# Altium PCB ist_pit.PcbDoc
Units mm, origin at the board's own origin, x right, y up, seen from the top; angles counter-clockwise.
Board outline 69.99 x 63.3 mm, 2 copper layers (Top Layer, Bottom Layer); 7 components, 5 nets, 28 pads, 0 vias.
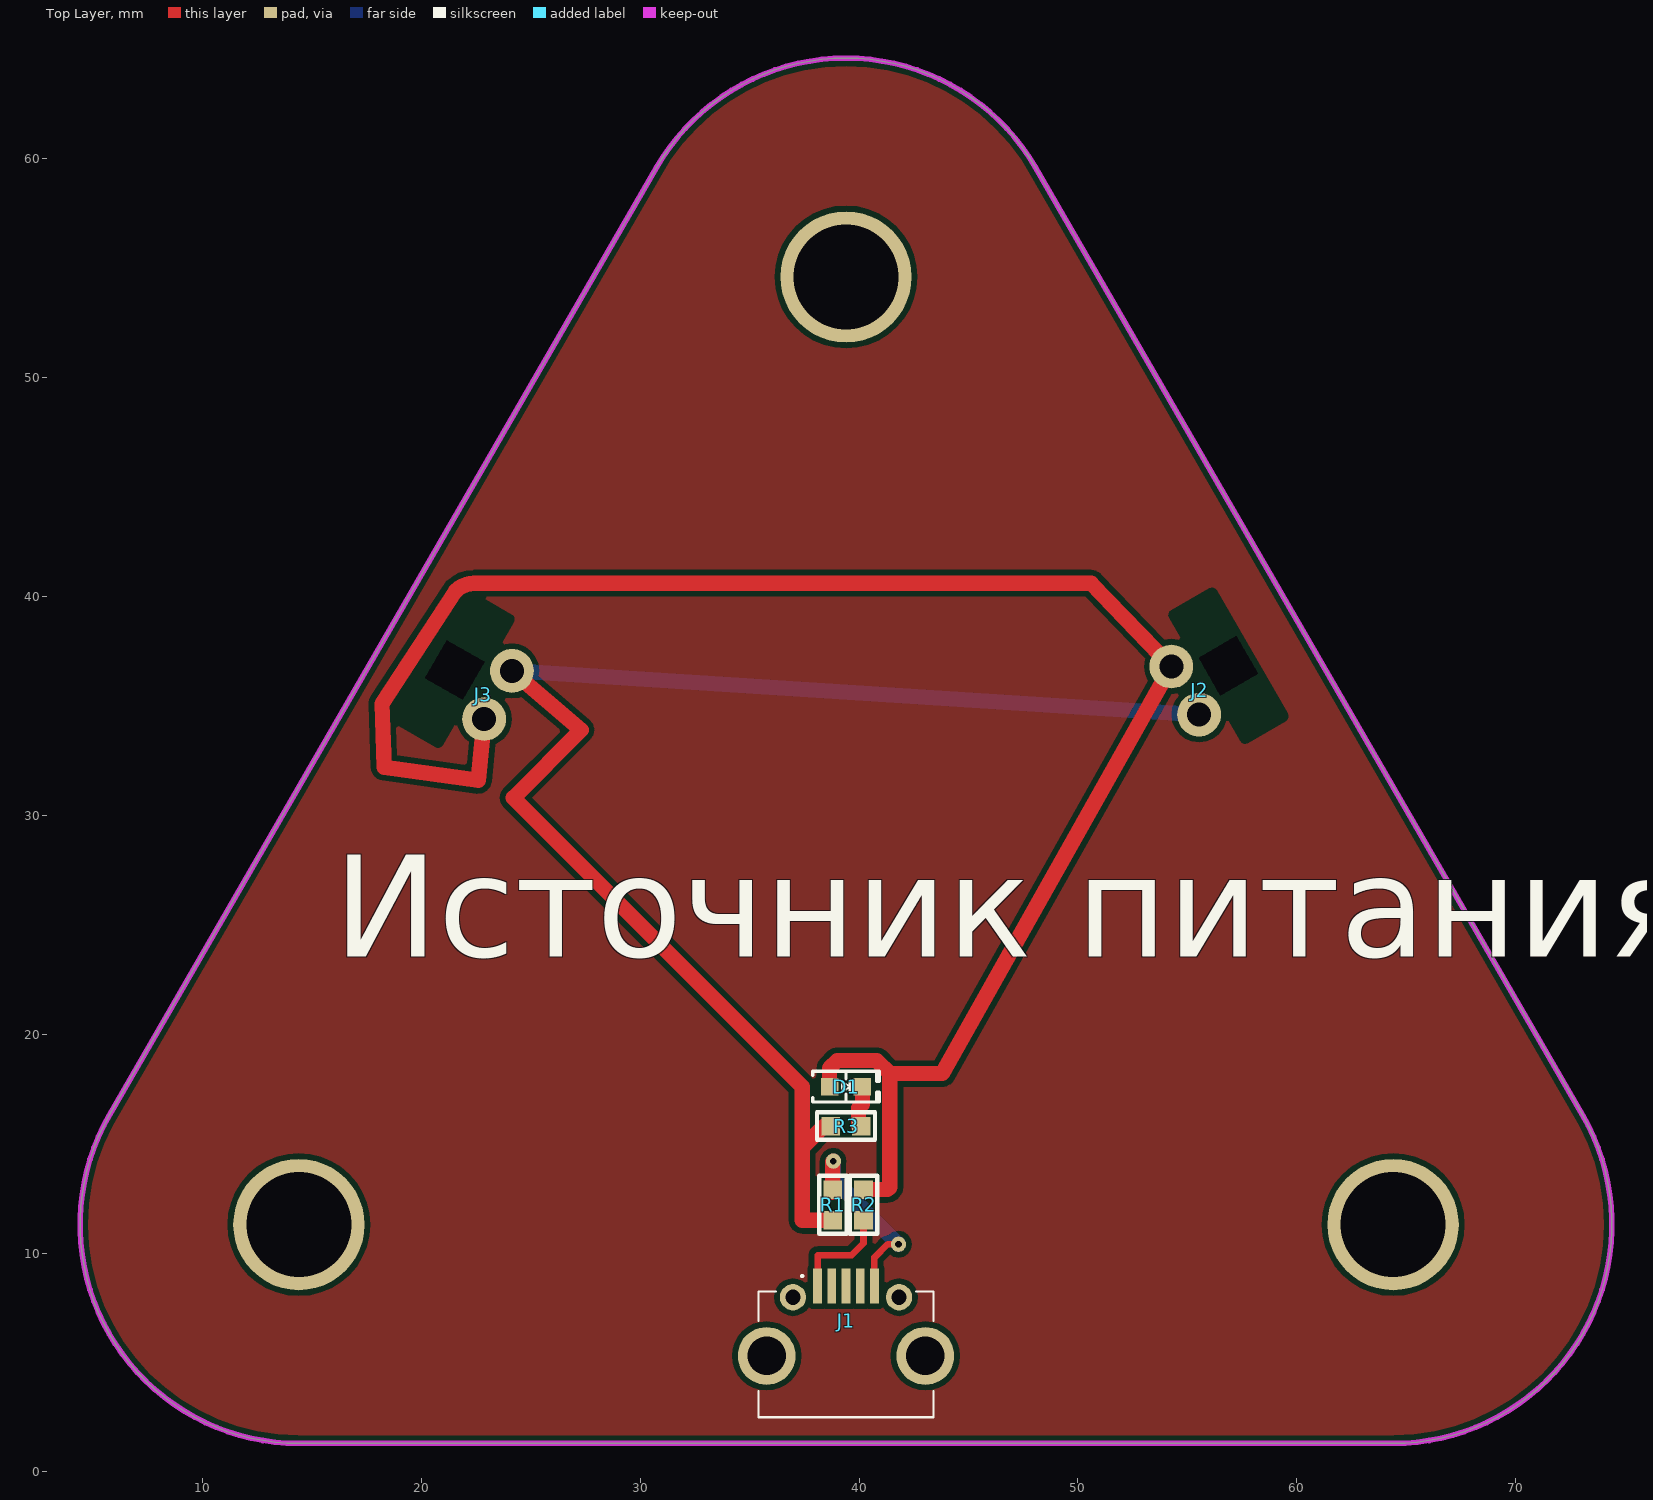
[diagram p0: Top Layer view]
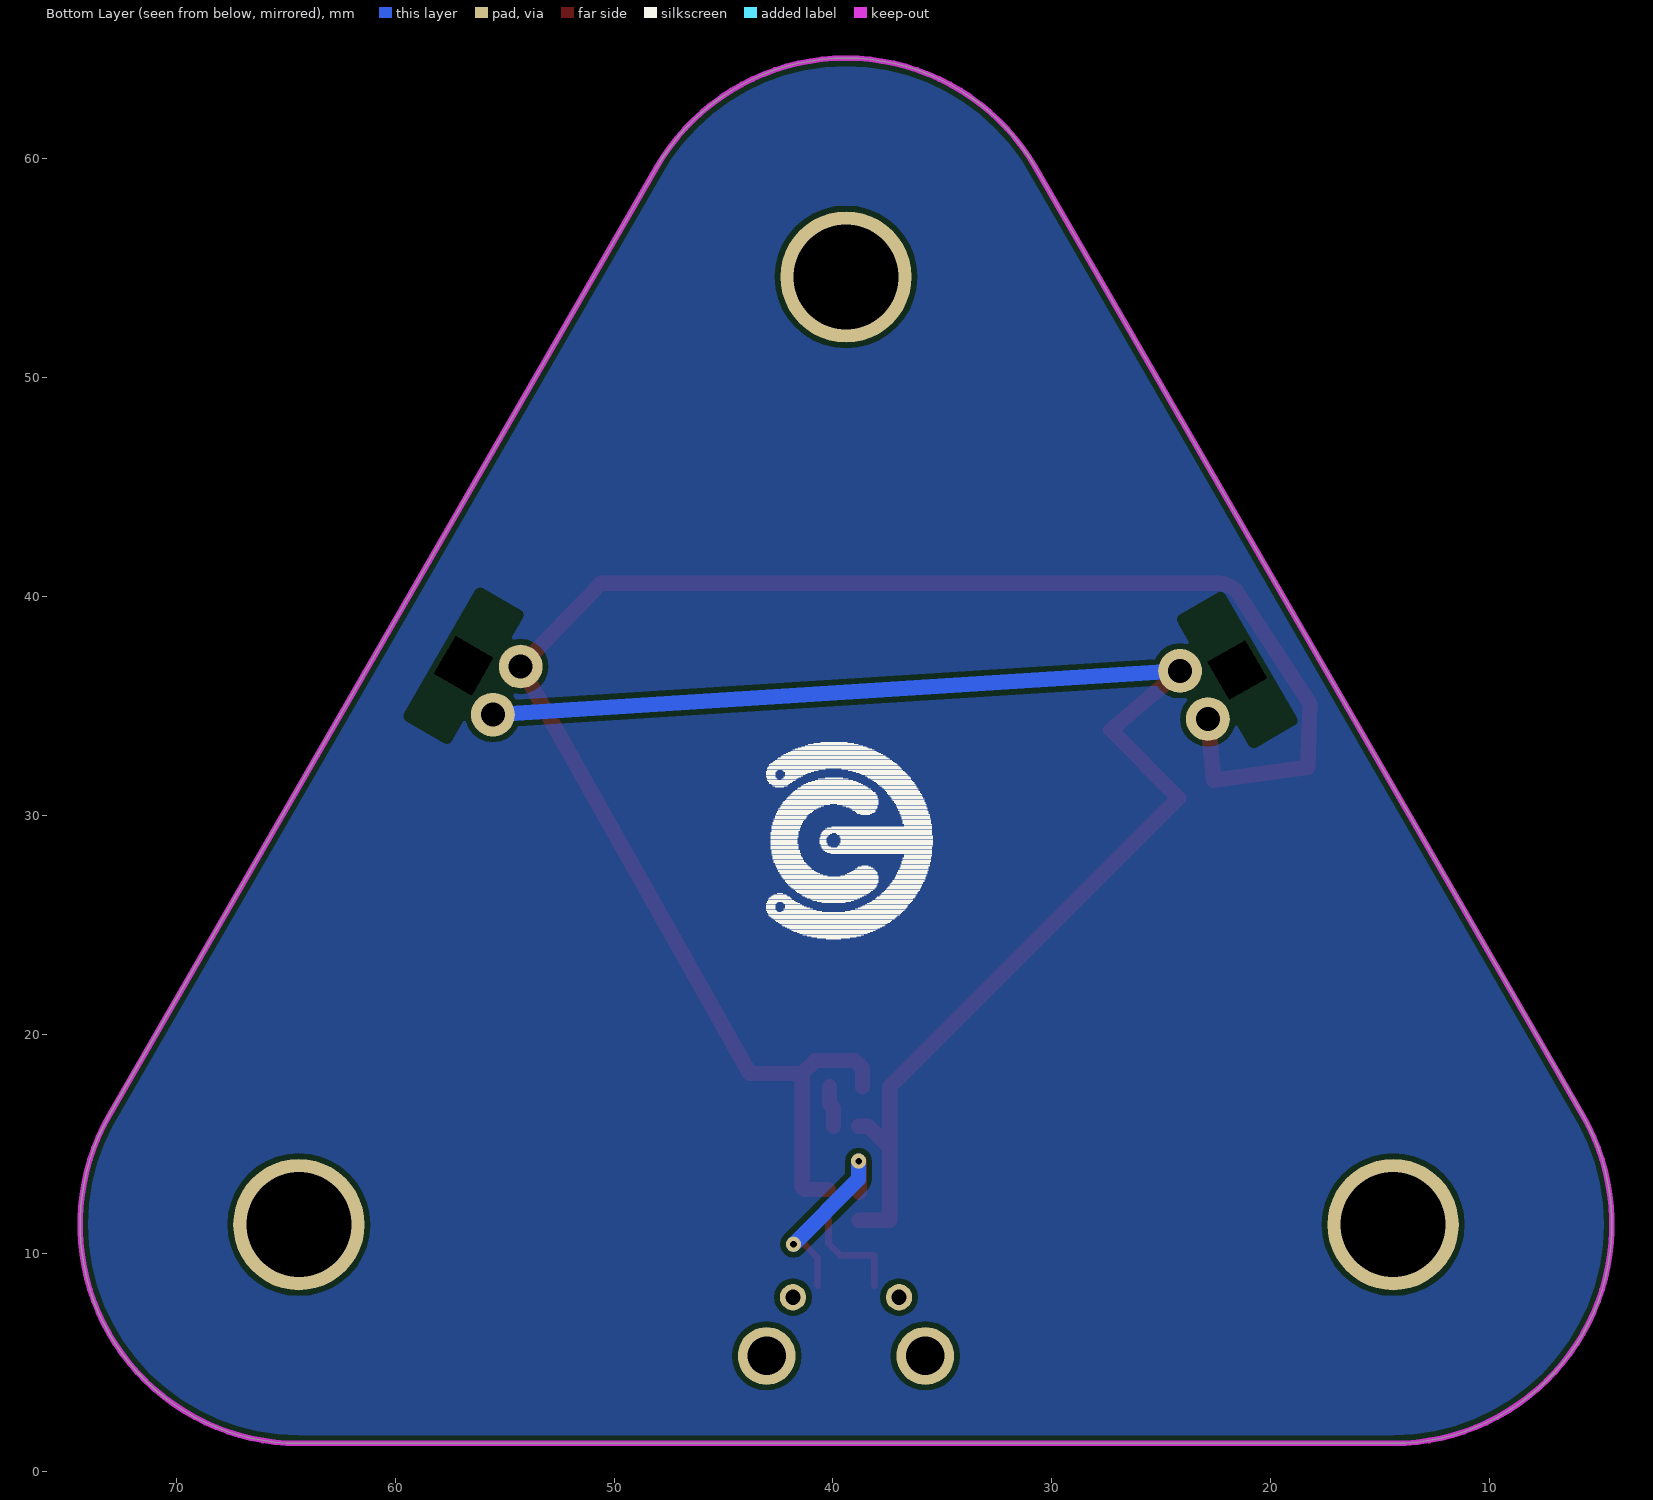
[diagram p1: Bottom Layer view, seen from below]
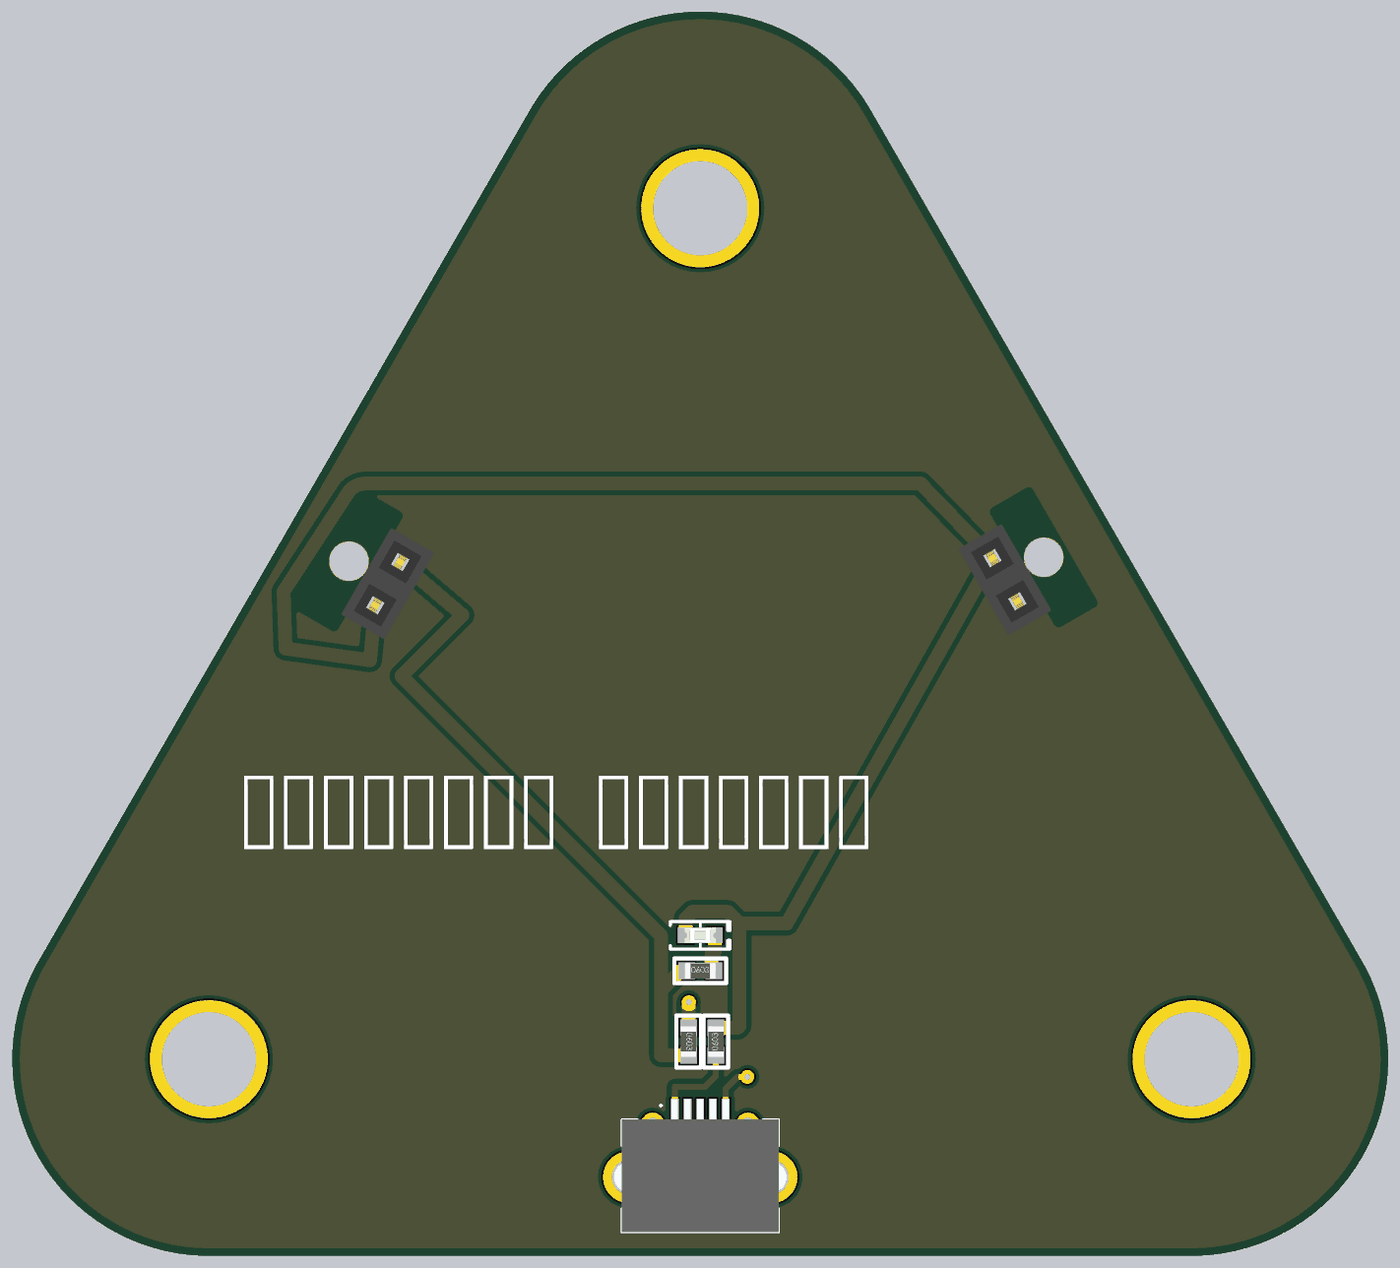
[diagram p2: 3D render of the assembled board from above, using the file's embedded part models]

## Layer stack, top to bottom
Top Solder: solder mask 0.0102, Solder Resist, Dk 3.5
Top Layer: signal copper 0.0356
Dielectric 1: dielectric 0.32, FR-4, Dk 4.8
Bottom Layer: signal copper 0.0356
Bottom Solder: solder mask 0.0102, Solder Resist, Dk 3.5

## Board outline
14.4,1.299 cw(c14.4,11.299) 5.74,16.299 30.74,59.6 cw(c39.4,54.6) 48.06,59.6 73.06,16.299 cw(c64.4,11.299) 64.4,1.299

## Design rules (kind name [scope] priority, off if disabled: settings)
Clearance [All] p1: gap=0.25 ignorepadtopadclearanceinfootprint=FALSE
PolygonConnect [All] p1: connectstyle=Relief reliefconductorwidth=0.254 reliefentries=4 polygonreliefangle="90 Angle" airgapwidth=0.254
RoutingVias [All] p1: holewidth=0.711 width=1.27 viastyle="Through Hole" minholewidth=0.711 minwidth=1.27 maxholewidth=0.711 maxwidth=1.27
SolderMaskExpansion [All] p1: expansion=0.102
Width [All] p1: maxlimit=2 minlimit=0.254 preferedwidth=0.7
30 further rules are at their usual default settings.

## Components (designator, comment, footprint, x,y, rotation, side; value= is the part's Value field where it differs from the comment)
D1 "Green" "LED 0603_1608 GREEN" 39.4,17.6 r0 top locked
J1 "C10418" C10418 39.4,5.5 r180 top locked
J2 "\"Разъем\"" "CON: PBS-2" 54.9,35.7 r120 top
J3 "\"Разъем\"" "CON: PBS-2" 23.5,35.5 r240 top
R1 "Resistor film, 100R, ±5%, 0603, 0.1W, -55...+125°C" "RES: 0603" 38.8,12.2 r270 top locked value=100R
R2 "Resistor film, 100R, ±5%, 0603, 0.1W, -55...+125°C" "RES: 0603" 40.2,12.2 r90 top locked value=100R
R3 "Resistor film, 100R, ±5%, 0603, 0.1W, -55...+125°C" "RES: 0603" 39.4,15.8 r0 top locked value=100R

## Footprints (in the part's own frame and the unit in brackets; to place one, negate y for a bottom-side part, rotate by r counter-clockwise, add the part's x,y. Pads: shape width x height; smd on the part's side, far side on the other; paste and mask are expansions set on the pad)
C10418 [mm]
  rect 0.4x1.6 smd: 1(1.3,-3) 2(0.65,-3) 3(0,-3) 4(-0.65,-3) 5(-1.3,-3)
  round 2.64 hole 1.76: 6(-3.625,0.2) 7(3.625,0.2)
  round 1.2 hole 0.7: 8(-2.425,-2.48) 9(2.425,-2.48)
  silkscreen extent -4,-3.5 4,3, body extent -4.4,-3.76 4.41,3, height 3.1
"CON: PBS-2" [mm]
  round 2 hole 1.1: 1(-1.27,0) 2(1.27,0)
  rrect50% 0x0 hole 2 square: ""(0,-2.28)
  body extent -2.54,-1.27 2.54,1.27, height 8.4
"LED 0603_1608 GREEN" [mm] "Chip Diode, 2-Leads, Body 1.60x0.80mm, IPC Medium Density"
  rect 0.8x0.8 smd: 1(-0.75,0) 2(0.75,0)
  silkscreen extent -1.52,-0.7 1.52,0.7, body extent -0.8,-0.4 0.8,0.4, height 0.53
"RES: 0603" [mm] "Chip Resistor, 2-Leads, Body 1.0x0.5mm, IPC Medium Density"
  rect 0.85x0.85 smd: 1(-0.7,0) 2(0.7,0)
  silkscreen extent -1.33,-0.63 1.33,0.63, body extent -0.8,-0.4 0.8,0.4, height 0.44

## Part data
D1: library part LSM0603453V, "LED SM 0603 3V -/1000/-MCD GREEN", Current - Test=20mA, Device Package="0603 (1608 Metric)", Lens Color=Colorless, Manufacturer="Visual Communications Company - VCC", Millicandela Rating=63mcd, Supplier Device Package="Chip LED", Supplier Part Number 1=LSM0603453VCT-ND, Voltage - Forward (Vf) (Typ)=2V, Color=Green, ComponentLink1Description=Datasheet, ComponentLink1URL=https://vcclite.com/wp-content/uploads/wpallimport/files/files/LSM0603453V.pdf, ComponentLink2Description="DigiKey Link", ComponentLink2URL=http://digikey.com/product-detail/en/visual-communications-company-vcc/LSM0603453V/LSM0603453VCT-ND/9486729, Configuration=Standard, Height (Max)=0.65mm, LastUpdated="21.01.2020 3:12:15", Lens Size="1.20mm x 0.80mm", Lens Style="Rectangle with Flat Top", Lens Transparency=Clear, Lifecycle Status=Active, Minimum Order=1, Mounting Type="Surface Mount", Package / Case="0603 (1608 Metric)", Packaging=TapeAndReel, PartId=579, Part Number=LSM0603453V, Part Status=Active, Price=0.06, Series=LSM0603, Size / Dimension="1.60mm L x 0.80mm W", Supplier 1=DigiKey, Viewing Angle=120°, Wavelength - Dominant=572nm, Wavelength - Peak=571nm
J1: "Connector", Manufacturer_Name="Jing Extension of the Electronic Co.", Datasheet Link=https://datasheet.lcsc.com/szlcsc/Jing-Extension-of-the-Electronic-Co-LCSC-MICRO-USB-5S-B-Type-horns-High-temperature_C10418.pdf, Height=3mm, Manufacturer_Part_Number=C10418
J2 J3: library part PBS-2-2
R1 R2 R3: library part Resistor_0603, Manufacturer=Yageo, Package=0603, PartNumber=RC0603JR-07100RL, Power=0.1W, Temperature=-55...+125°C, Tolerance=±5%, TypeResistor="Resistor film", HelpURL=https://www.digikey.com/product-detail/en/yageo/RC0603JR-07100RL/311-100GRCT-ND/729644, ValueManufacturerPartNumber="Resistor film, 100R, ±5%, 0603, 0.1W, -55...+125°C"

## Free pads (board coordinates)
  round 6 hole 4.8: 8(14.4,11.299) 8(39.4,54.6) 8(64.4,11.299)
  round 0.7 hole 0.3: 9(41.8,10.4) 10(38.825,14.2)

## Nets (pads, with @x,y where several pads share a name; then routed paths per layer and width w, separated by ;. In a path a pad name is that pad's centre, name@x,y a point inside that pad or via, vN(x,y) a via of type N, cw(c..) or ccw(c..) an arc to the next point about the centre after c; other vN are vias at no path point)
GND: J2.1 J3.1 R1.2 R3.1 | length 68
  Top Layer w0.7: J3.1 27.3,33.9 24.2,30.8 37.4,17.6 37.4,14.8 ; R1.2 37.4,11.5 37.4,12.2 37.4,14.8 ; R3.1@38.825,15.8 38.4,15.8 37.4,14.8
  Bottom Layer w0.7: J3.1 J2.1
NetD1_2: D1.2 R3.2 | length 1.9
  Top Layer w0.7: R3.2@39.975,15.8 39.975,16.625 40.15,16.8 D1.2
NetJ1_1: J1.1 R2.1 | length 4.8
  Top Layer w0.3: J1.1 38.1,9.9 39.65,9.9 40.2,10.45 R2.1
NetJ1_5: J1.5 pad.9 pad.10 R1.1 | length 9.1
  Top Layer w0.3: J1.5 40.7,9.8 41.3,10.4 pad.9
  Top Layer w0.7: R1.1@38.8,12.775 38.8,14.175 pad.10
  Bottom Layer w0.7: pad.10 38.825,13.375 pad.9
VCC: D1.1 J2.2 J3.2 R2.2 | length 84.8
  Top Layer w0.7: J3.2 22.6,31.6 18.3,32.2 18.2,35.1 21.568,40.255 cw(c22.4,39.423) 22.4,40.6 50.6,40.6 J2.2 43.8,18.2 41.4,18.2 ; D1.1 38.65,18.45 39,18.8 40.8,18.8 41.4,18.2 ; R2.2 41.3,12.9 41.4,13 41.4,15.2 41.4,18.2
pads on no net: J1.2 J1.3 J1.4 J1.6 J1.7 J1.8 J1.9 J2. J3.

## Polygon pours and split planes (outlines as drawn)
no net on Top Layer "Top Layer-No Net" (solid, pour order 0): 32.6,41
no net on Top Layer "Top Layer-No Net1" (solid, pour order 4): 14.4,1.299 cw(c14.4,11.299) 5.74,16.299 30.74,59.6 cw(c39.4,54.6) 48.06,59.6 73.06,16.299 cw(c64.4,11.299) 64.4,1.299
no net on Bottom Layer "Top Layer-No Net2" (solid, pour order 5): 14.4,1.299 cw(c14.4,11.299) 5.74,16.299 30.74,59.6 cw(c39.4,54.6) 48.06,59.6 73.06,16.299 cw(c64.4,11.299) 64.4,1.299

## Keep-outs
Keep-Out Layer:
  the board outline again, w0.254

## Silkscreen, mask and mechanical layers (free items; w line width, h text height)
Top Overlay:
  text "Источник питания" at 16,22 h8
Bottom Overlay:
  drawing of 376 lines, arcs and shapes, not listed